# Altium PCB VESC_BMS.PcbDoc (part 3 of 4)
Units mm, origin at the board's own origin, x right, y up, seen from the top; angles counter-clockwise.
Board outline 100 x 75 mm, 4 copper layers (L1, L2, L3, L4), stack 1.446 mm thick; 263 components, 195 nets, 808 pads, 1031 vias.
Unrouted connection lines stored in the file: 1.
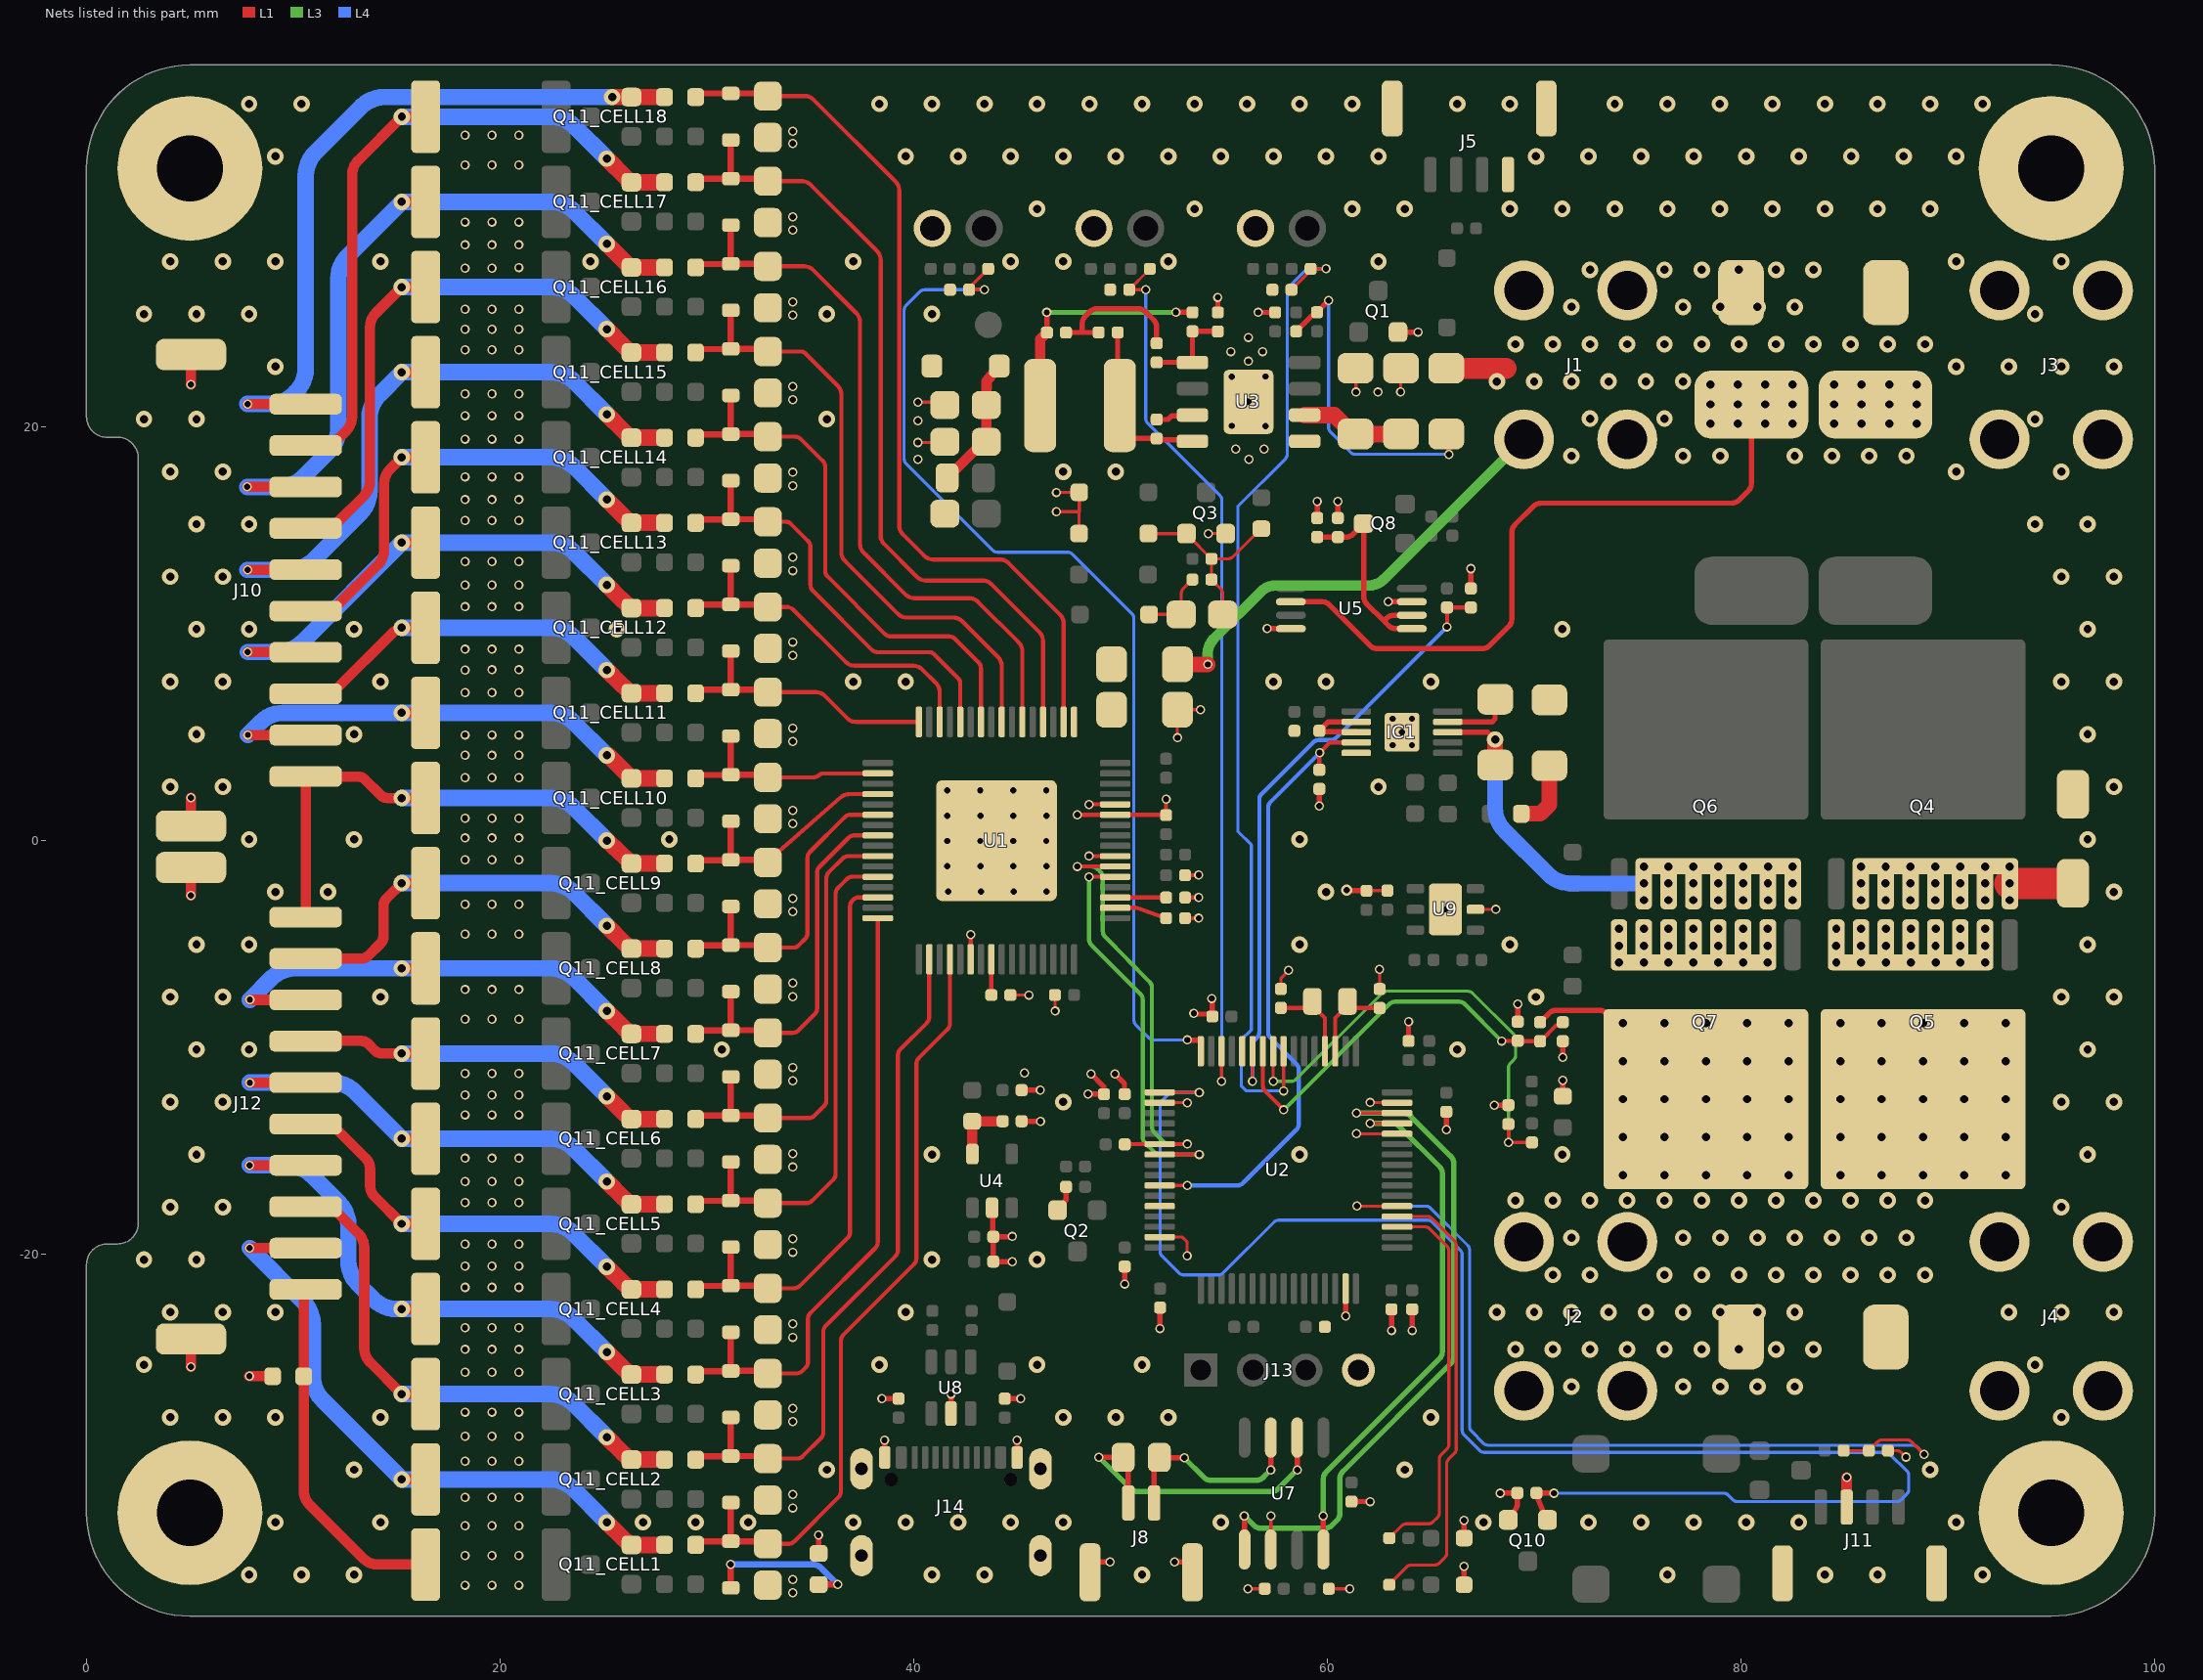
[diagram p4: the nets of this part, all layers, seen from the top]

## Via types
v1: diameter 0.8, hole 0.4, L1 to L4, tented both sides, 496 vias
v2: diameter 0.45, hole 0.3, L1 to L4, tented both sides, 449 vias
v3: diameter 0.6, hole 0.4, L1 to L4, tented both sides, 84 vias
v4: diameter 0.55, hole 0.3, L1 to L4, tented both sides, 2 vias

## Nets (pads, with @x,y where several pads share a name; then routed paths per layer and width w, separated by ;. In a path a pad name is that pad's centre, name@x,y a point inside that pad or via, vN(x,y) a via of type N, cw(c..) or ccw(c..) an arc to the next point about the centre after c; other vN are vias at no path point) (continued)
BATT+: D7.2 J1.1 R1.1 R20.1 R32.0 R33.0 U5.2 | length 57.5
  L1 w0.254: U5.2@58.232,11.548 59.733,11.548 cw(c59.733,11.04) 60.092,11.4 62.062,9.429 ccw(c62.421,9.789) 62.421,9.281 67.48,9.281 ccw(c67.48,9.789) 67.839,9.429 68.771,10.361 ccw(c68.411,10.72) 68.919,10.72 68.919,14.909 cw(c69.427,14.909) 69.067,15.267 69.968,16.169 cw(c70.327,15.809) 70.327,16.317 79.552,16.317 ccw(c79.552,16.825) 79.91,16.465 80.352,16.907 ccw(c79.992,17.265) 80.5,17.265 R33.0@80.5,21.079
  L1 w0.762: R1.1@52.748,8.523 52.754,8.518 v2(54.213,8.518)
  L1 w1.016: R20.1@65.755,22.84 68.633,22.84
  L3 w0.508: v2(54.213,8.518) 54.213,9.041 cw(c55.229,9.041) 54.509,9.759 56.792,12.041 cw(c57.509,11.322) 57.509,12.338 62.014,12.338 ccw(c62.014,13.354) 62.731,12.634 J1.1@69.497,19.4
  other v1: 71.8,18.6 77.2,18.6 79,18.6 82.6,18.6 84.4,18.6 86.2,18.6 88,18.6 78.512,20.159 79.841,20.159 81.17,20.159 82.5,20.159 84.508,20.159 85.837,20.159 87.166,20.159 88.496,20.159 72.7,20.4 76.3,20.4 78.512,21.092 79.841,21.092 81.17,21.092 82.5,21.092 84.508,21.092 85.837,21.092 87.166,21.092 88.496,21.092 78.512,22.058 79.841,22.058 81.17,22.058 82.5,22.058 84.508,22.058 85.837,22.058 87.166,22.058 88.496,22.058 68.2,22.2 70,22.2 71.8,22.2 73.6,22.2 75.4,22.2 77.2,22.2 69.1,24 70.9,24 72.7,24 74.5,24 76.3,24 78.1,24 79.9,24 81.7,24 83.5,24 85.3,24 87.1,24 88.9,24 71.8,25.8 77.2,25.8 79,25.8 80.8,25.8 82.6,25.8 72.7,27.6 76.3,27.6 78.1,27.6 79.9,27.6 81.7,27.6 83.5,27.6
BT_EN: R47.1 R48.2 U2.53 | length 43.8
  L1 w0.152: v2(61.423,-17.673) U2.53@63.369,-17.673 ; R47.1@84.965,-29.496 85.105,-29.496 R48.2@86.183,-29.496 86.613,-29.065 cw(c86.828,-29.282) 86.828,-28.977 88.019,-28.977 cw(c88.019,-29.282) 88.234,-29.066 v2(88.85,-29.681)
  L4 w0.152: v2(61.423,-17.673) 64.763,-17.673 cw(c64.763,-17.978) 64.977,-17.762 66.784,-19.568 cw(c66.568,-19.783) 66.873,-19.783 66.873,-28.333 ccw(c67.177,-28.333) 66.961,-28.548 67.558,-29.145 ccw(c67.772,-28.928) 67.772,-29.233 88.299,-29.233 cw(c88.299,-29.538) 88.514,-29.322 88.791,-29.598 cw(c88.576,-29.815) v2(88.85,-29.681)
BUZZER: Q10.G R52.1 U2.17 | length 79.7
  L1 w0.152: U2.17@51.893,-12.173 v2(53.806,-12.173)
  L1 w0.254: R52.1@70.108,-31.542 70.939,-31.542 v2(70.951,-31.554) ; R52.1@70.108,-31.542 70.136,-31.681 ccw(c70.524,-31.583) 70.151,-31.728 70.49,-32.592 Q10.G@70.648,-32.842
  L4 w0.152: v2(53.806,-12.173) 52.573,-12.173 ccw(c52.573,-12.573) 52.291,-12.29 52.027,-12.554 ccw(c52.31,-12.836) 51.91,-12.836 51.91,-19.866 ccw(c52.215,-19.866) 51.998,-20.081 52.829,-20.912 ccw(c53.044,-20.695) 53.044,-21 54.736,-21 ccw(c54.736,-20.695) 54.951,-20.912 57.422,-18.441 cw(c57.637,-18.657) 57.637,-18.353 64.859,-18.353 cw(c64.859,-18.657) 65.074,-18.441 66.428,-19.795 cw(c66.212,-20.01) 66.516,-20.01 66.516,-28.519 ccw(c66.821,-28.519) 66.605,-28.733 67.361,-29.49 ccw(c67.576,-29.273) 67.576,-29.578 86.991,-29.578 cw(c86.991,-29.883) 87.206,-29.667 88.022,-30.482 cw(c87.806,-30.697) 88.111,-30.697 88.111,-31.368 cw(c87.806,-31.368) 88.022,-31.583 87.736,-31.869 cw(c87.521,-31.653) 87.521,-31.958 79.822,-31.958 cw(c79.822,-31.653) 79.607,-31.869 79.381,-31.643 ccw(c79.166,-31.859) 79.166,-31.554 v2(70.951,-31.554)
C1: C45_CELL1.2 D13_CELL1.2 D13_CELL2.1 R58_CELL1.2 U1.36 | length 37.9
  L1 w0.2: C45_CELL1.2@32.95,-33.999 33.983,-33.999 34.021,-33.992 ccw(c33.943,-33.599) 34.226,-33.883 36.363,-31.745 ccw(c36.08,-31.463) 36.48,-31.463 36.48,-24.178 cw(c36.88,-24.178) 36.596,-23.896 40.008,-20.483 ccw(c39.725,-20.201) 40.125,-20.201 40.125,-10.801 cw(c40.525,-10.801) 40.242,-10.519 41.633,-9.127 ccw(c41.35,-8.845) 41.75,-8.845 U1.36@41.75,-5.738
  L1 w0.3: R58_CELL1.2@29.452,-34.05 29.653,-33.885 30.887,-33.885 D13_CELL1.2@31.15,-33.875 ; D13_CELL2.1@31.15,-32.007 D13_CELL1.2@31.15,-33.875 ; C45_CELL1.2@32.95,-33.999 32.613,-33.875 D13_CELL1.2@31.15,-33.875
C2: C45_CELL2.2 D13_CELL2.2 D13_CELL3.1 R58_CELL2.2 U1.34 | length 33.6
  L1 w0.2: C45_CELL2.2@32.95,-29.882 34.355,-29.882 ccw(c34.355,-29.482) 34.637,-29.765 35.51,-28.892 ccw(c35.227,-28.61) 35.627,-28.61 35.627,-23.74 cw(c36.027,-23.74) 35.743,-23.457 39.118,-20.082 ccw(c38.835,-19.8) 39.235,-19.8 39.235,-10.37 cw(c39.635,-10.37) 39.352,-10.088 40.633,-8.806 ccw(c40.35,-8.524) 40.75,-8.524 U1.34@40.75,-5.738
  L1 w0.3: R58_CELL2.2@29.452,-29.932 29.653,-29.768 30.887,-29.768 D13_CELL2.2@31.15,-29.757 ; D13_CELL3.1@31.15,-27.89 D13_CELL2.2@31.15,-29.757 ; C45_CELL2.2@32.95,-29.882 32.613,-29.757 D13_CELL2.2@31.15,-29.757
C3: C45_CELL3.2 D13_CELL3.2 D13_CELL4.1 R58_CELL3.2 U1.32 | length 30.5
  L1 w0.2: C45_CELL3.2@32.95,-25.764 34.323,-25.764 ccw(c34.323,-25.364) 34.605,-25.647 34.771,-25.482 ccw(c34.487,-25.2) 34.887,-25.2 34.887,-23.12 cw(c35.287,-23.12) 35.004,-22.838 38.145,-19.696 ccw(c37.862,-19.414) 38.262,-19.414 U1.32@38.262,-3.75
  L1 w0.3: R58_CELL3.2@29.452,-25.815 29.653,-25.65 30.887,-25.65 D13_CELL3.2@31.15,-25.64 ; D13_CELL4.1@31.15,-23.772 D13_CELL3.2@31.15,-25.64 ; C45_CELL3.2@32.95,-25.764 32.613,-25.64 D13_CELL3.2@31.15,-25.64
C4: C45_CELL4.2 D13_CELL4.2 D13_CELL5.1 R58_CELL4.2 U1.30 | length 27.9
  L1 w0.2: C45_CELL4.2@32.95,-21.646 34.203,-21.646 ccw(c34.203,-21.246) 34.485,-21.53 36.8,-19.215 ccw(c36.516,-18.933) 36.916,-18.933 36.916,-3.186 cw(c37.316,-3.186) 37.033,-2.904 37.098,-2.838 cw(c37.313,-3.055) 37.313,-2.75 U1.30@38.262,-2.75
  L1 w0.3: R58_CELL4.2@29.452,-21.697 29.653,-21.532 30.887,-21.532 D13_CELL4.2@31.15,-21.522 ; D13_CELL5.1@31.15,-19.654 D13_CELL4.2@31.15,-21.522 ; C45_CELL4.2@32.95,-21.646 32.613,-21.522 D13_CELL4.2@31.15,-21.522
C5: C45_CELL5.2 D13_CELL5.2 D13_CELL6.1 R58_CELL5.2 U1.28 | length 25.4
  L1 w0.2: C45_CELL5.2@32.95,-17.529 34.806,-17.529 ccw(c34.806,-17.129) 35.088,-17.412 36.107,-16.393 ccw(c35.824,-16.11) 36.224,-16.11 36.224,-2.562 cw(c36.624,-2.562) 36.341,-2.28 36.754,-1.867 cw(c37.036,-2.15) 37.036,-1.75 U1.28@38.262,-1.75
  L1 w0.3: R58_CELL5.2@29.452,-17.579 29.653,-17.415 30.887,-17.415 D13_CELL5.2@31.15,-17.404 ; D13_CELL6.1@31.15,-15.537 D13_CELL5.2@31.15,-17.404 ; C45_CELL5.2@32.95,-17.529 32.613,-17.404 D13_CELL5.2@31.15,-17.404
C6: C45_CELL6.2 D13_CELL6.2 D13_CELL7.1 R58_CELL6.2 U1.26 | length 22.4
  L1 w0.2: C45_CELL6.2@32.95,-13.411 34.923,-13.411 ccw(c34.923,-13.011) 35.206,-13.294 35.657,-12.843 ccw(c35.374,-12.56) 35.774,-12.56 35.774,-1.818 cw(c36.174,-1.818) 35.891,-1.535 36.559,-0.867 cw(c36.842,-1.15) 36.842,-0.75 U1.26@38.262,-0.75
  L1 w0.3: R58_CELL6.2@29.452,-13.462 29.653,-13.297 30.887,-13.297 D13_CELL6.2@31.15,-13.287 ; D13_CELL7.1@31.15,-11.419 D13_CELL6.2@31.15,-13.287 ; C45_CELL6.2@32.95,-13.411 32.613,-13.287 D13_CELL6.2@31.15,-13.287
C7: C45_CELL7.2 D13_CELL7.2 D13_CELL8.1 R58_CELL7.2 U1.24 | length 18.7
  L1 w0.2: C45_CELL7.2@32.95,-9.293 34.141,-9.293 ccw(c34.141,-8.893) 34.423,-9.177 35.213,-8.387 ccw(c34.93,-8.105) 35.33,-8.105 35.33,-1.545 cw(c35.73,-1.545) 35.446,-1.262 36.842,0.133 cw(c37.124,-0.15) 37.047,0.242 37.085,0.25 U1.24@38.262,0.25
  L1 w0.3: R58_CELL7.2@29.452,-9.344 29.653,-9.179 30.887,-9.179 D13_CELL7.2@31.15,-9.169 ; D13_CELL8.1@31.15,-7.301 D13_CELL7.2@31.15,-9.169 ; C45_CELL7.2@32.95,-9.293 32.613,-9.169 D13_CELL7.2@31.15,-9.169
C8: C45_CELL8.2 D13_CELL8.2 D13_CELL9.1 R58_CELL8.2 U1.22 | length 15.7
  L1 w0.2: C45_CELL8.2@32.95,-5.176 34.159,-5.176 ccw(c34.159,-4.776) 34.441,-5.059 34.743,-4.757 ccw(c34.459,-4.475) 34.859,-4.475 34.859,-0.835 cw(c35.259,-0.835) 34.976,-0.552 36.662,1.133 cw(c36.944,0.85) 36.944,1.25 U1.22@38.262,1.25
  L1 w0.3: R58_CELL8.2@29.452,-5.226 29.653,-5.062 30.887,-5.062 D13_CELL8.2@31.15,-5.051 ; D13_CELL9.1@31.15,-3.184 D13_CELL8.2@31.15,-5.051 ; C45_CELL8.2@32.95,-5.176 32.613,-5.051 D13_CELL8.2@31.15,-5.051
C9: C45_CELL9.2 D13_CELL9.2 D13_CELL10.1 R58_CELL9.2 U1.20 | length 12
  L1 w0.2: C45_CELL9.2@33.287,-0.69 36.461,2.086 cw(c36.899,1.584) 36.899,2.25 U1.20@38.262,2.25
  L1 w0.3: R58_CELL9.2@29.452,-1.109 29.653,-0.944 30.887,-0.944 D13_CELL9.2@31.15,-0.934 ; D13_CELL10.1@31.15,0.934 D13_CELL9.2@31.15,-0.934 ; C45_CELL9.2@33.287,-0.69 C45_CELL9.2@32.95,-1.058 32.613,-0.934 D13_CELL9.2@31.15,-0.934
C10: C45_CELL10.2 D13_CELL10.2 D13_CELL11.1 R58_CELL10.2 U1.18 | length 10.8
  L1 w0.2: C45_CELL10.2@32.95,3.06 35.146,3.06 ccw(c35.144,3.46) 35.384,3.139 35.426,3.17 cw(c35.665,2.85) 35.665,3.25 U1.18@38.262,3.25
  L1 w0.3: R58_CELL10.2@29.452,3.009 29.653,3.174 30.887,3.174 D13_CELL10.2@31.15,3.184 ; D13_CELL11.1@31.15,5.051 D13_CELL10.2@31.15,3.184 ; C45_CELL10.2@32.95,3.06 32.613,3.184 D13_CELL10.2@31.15,3.184
C11: C45_CELL11.2 D13_CELL11.2 D13_CELL12.1 R58_CELL11.2 U1.16 | length 13.3
  L1 w0.2: C45_CELL11.2@33.287,7.177 35.274,7.177 cw(c35.274,6.577) 35.698,7.002 36.787,5.913 ccw(c37.211,6.338) 37.211,5.738 U1.16@40.25,5.738
  L1 w0.3: R58_CELL11.2@29.452,7.126 29.653,7.291 30.887,7.291 D13_CELL11.2@31.15,7.301 ; D13_CELL12.1@31.15,9.169 D13_CELL11.2@31.15,7.301 ; C45_CELL11.2@33.287,7.177 C45_CELL11.2@32.95,7.177 32.613,7.301 D13_CELL11.2@31.15,7.301
C12: C45_CELL12.2 D13_CELL12.2 D13_CELL13.1 R58_CELL12.2 U1.14 | length 16.9
  L1 w0.2: C45_CELL12.2@33.287,11.295 33.93,11.295 34.127,11.214 36.721,8.63 ccw(c37.144,9.056) 37.142,8.456 39.983,8.456 cw(c39.983,7.856) 40.407,8.281 41.075,7.613 cw(c40.65,7.19) 41.237,7.313 41.25,7.252 41.25,6.916 41.25,6.326 U1.14@41.25,5.738
  L1 w0.3: R58_CELL12.2@29.452,11.244 29.653,11.409 30.887,11.409 D13_CELL12.2@31.15,11.419 ; D13_CELL13.1@31.15,13.287 D13_CELL12.2@31.15,11.419 ; C45_CELL12.2@33.287,11.295 C45_CELL12.2@32.95,11.295 32.613,11.419 D13_CELL12.2@31.15,11.419
C13: C45_CELL13.2 D13_CELL13.2 D13_CELL14.1 R58_CELL13.2 U1.12 | length 21.1
  L1 w0.2: C45_CELL13.2@32.95,15.413 33.83,15.413 cw(c33.83,15.108) 34.046,15.323 34.888,14.481 cw(c34.605,14.199) 35.005,14.199 35.005,12.36 ccw(c35.405,12.361) 35.121,12.079 37.972,9.228 ccw(c38.254,9.512) 38.253,9.112 40.723,9.112 cw(c40.723,8.712) 41.006,8.994 42.133,7.867 cw(c41.85,7.584) 42.25,7.584 42.25,6.376 U1.12@42.25,5.738
  L1 w0.3: R58_CELL13.2@29.452,15.362 29.653,15.527 30.887,15.527 D13_CELL13.2@31.15,15.537 ; D13_CELL14.1@31.15,17.404 D13_CELL13.2@31.15,15.537 ; C45_CELL13.2@32.95,15.413 32.613,15.537 D13_CELL13.2@31.15,15.537
C14: C45_CELL14.2 D13_CELL14.2 D13_CELL15.1 R58_CELL14.2 U1.10 | length 26.1
  L1 w0.2: C45_CELL14.2@32.95,19.53 34.263,19.53 cw(c34.263,19.13) 34.545,19.414 35.601,18.358 cw(c35.318,18.075) 35.718,18.075 35.718,13.046 ccw(c36.118,13.048) 35.835,12.765 38.613,9.987 ccw(c38.895,10.271) 38.893,9.871 41.713,9.871 cw(c41.713,9.471) 41.997,9.753 43.133,8.617 cw(c42.85,8.334) 43.25,8.336 43.25,6.376 U1.10@43.25,5.738
  L1 w0.3: R58_CELL14.2@29.452,19.479 29.653,19.644 30.887,19.644 D13_CELL14.2@31.15,19.654 ; D13_CELL15.1@31.15,21.522 D13_CELL14.2@31.15,19.654 ; C45_CELL14.2@32.95,19.53 32.613,19.654 D13_CELL14.2@31.15,19.654
C15: C45_CELL15.2 D13_CELL15.2 D13_CELL16.1 R58_CELL15.2 U1.8 | length 30.8
  L1 w0.2: C45_CELL15.2@33.287,23.648 C45_CELL15.2@32.95,23.648 34.539,23.648 cw(c34.539,23.348) 34.75,23.561 36.324,21.986 cw(c35.9,21.562) 36.326,21.985 cw(c35.9,21.562) 36.5,21.562 36.5,13.947 ccw(c37.1,13.949) 36.674,13.526 39.244,10.956 ccw(c39.667,11.382) 39.667,10.782 41.92,10.782 cw(c41.92,10.182) 42.344,10.606 44.075,8.875 cw(c43.65,8.451) 44.25,8.451 44.25,7.252 44.25,6.916 44.25,6.326 U1.8@44.25,5.738
  L1 w0.3: R58_CELL15.2@29.452,23.597 29.653,23.762 30.887,23.762 D13_CELL15.2@31.15,23.772 ; D13_CELL16.1@31.15,25.64 D13_CELL15.2@31.15,23.772 ; C45_CELL15.2@32.95,23.648 32.613,23.772 D13_CELL15.2@31.15,23.772
C16: C45_CELL16.2 D13_CELL16.2 D13_CELL17.1 R58_CELL16.2 U1.6 | length 35.4
  L1 w0.2: C45_CELL16.2@33.287,27.765 34.71,27.765 cw(c34.71,27.165) 35.134,27.59 37.224,25.5 cw(c36.8,25.076) 37.4,25.076 37.4,14.347 ccw(c38,14.349) 37.574,13.926 39.605,11.895 ccw(c40.027,12.321) 40.027,11.721 42.68,11.721 cw(c42.68,11.121) 43.104,11.546 45.075,9.575 cw(c44.65,9.151) 45.25,9.151 45.25,7.252 45.25,6.916 45.25,6.326 U1.6@45.25,5.738
  L1 w0.3: R58_CELL16.2@29.452,27.715 29.653,27.879 30.887,27.879 D13_CELL16.2@31.15,27.89 ; D13_CELL17.1@31.15,29.757 D13_CELL16.2@31.15,27.89 ; C45_CELL16.2@33.287,27.765 C45_CELL16.2@32.95,27.765 32.613,27.89 D13_CELL16.2@31.15,27.89
C17: C45_CELL17.2 D13_CELL17.2 D13_CELL18.1 R58_CELL17.2 U1.4 | length 40
  L1 w0.2: C45_CELL17.2@33.287,31.883 34.601,31.883 34.607,31.883 cw(c34.595,31.283) 35.019,31.708 38.224,28.503 cw(c37.8,28.079) 38.4,28.079 38.4,14.747 ccw(c39,14.749) 38.574,14.326 40.152,12.748 ccw(c40.575,13.174) 40.575,12.574 43.328,12.574 cw(c43.328,11.974) 43.752,12.398 46.075,10.075 cw(c45.65,9.651) 46.25,9.651 46.25,7.252 46.25,6.916 46.25,6.326 U1.4@46.25,5.738
  L1 w0.3: R58_CELL17.2@29.452,31.832 29.653,32.007 D13_CELL17.2@31.15,32.007 ; D13_CELL18.1@31.15,33.875 D13_CELL17.2@31.15,32.007 ; C45_CELL17.2@33.287,31.883 C45_CELL17.2@32.95,31.883 32.613,32.007 D13_CELL17.2@31.15,32.007
C18: C45_CELL18.2 D13_CELL18.2 R58_CELL18.2 U1.2 | length 43
  L1 w0.2: C45_CELL18.2@33.287,36.001 34.733,36.001 cw(c34.733,35.401) 35.156,35.826 39.125,31.857 cw(c38.7,31.434) 39.3,31.434 39.3,15.226 ccw(c39.9,15.227) 39.474,14.804 40.513,13.766 ccw(c40.936,14.192) 40.936,13.592 44.16,13.592 cw(c44.16,12.992) 44.584,13.416 47.074,10.926 cw(c46.65,10.501) 47.25,10.501 47.25,7.252 47.25,6.916 47.25,6.326 U1.2@47.25,5.738
  L1 w0.3: R58_CELL18.2@29.452,35.95 29.653,36.125 32.613,36.125 C45_CELL18.2@32.95,36.001 C45_CELL18.2@33.287,36.001
CAN_RX: U2.61 U7.4 | length 26.4
  L1 w0.152: v2(62.067,-13.673) U2.61@63.369,-13.673
  L1 w0.254: v2(59.8,-32.656) 59.802,-32.671 cw(c59.296,-32.721) 59.804,-32.721 59.804,-34.213 ccw(c60.312,-34.212) U7.4@59.808,-34.275
  L3 w0.254: v2(59.8,-32.656) ccw(c59.298,-32.577) 59.806,-32.577 59.806,-30.866 cw(c60.314,-30.866) 59.954,-30.508 65.415,-25.047 ccw(c65.055,-24.689) 65.563,-24.689 65.563,-16.11 ccw(c65.055,-16.11) 65.415,-15.751 63.484,-13.821 ccw(c63.126,-14.181) 63.126,-13.673 v2(62.067,-13.673)
CAN_TX: U2.62 U7.1 | length 33.8
  L1 w0.152: v2(61.404,-13.168) ccw(c61.449,-12.77) 61.449,-13.17 62.732,-13.17 U2.62@63.369,-13.173
  L1 w0.254: v2(55.981,-32.648) 55.984,-32.665 cw(c55.482,-32.741) 55.99,-32.741 55.99,-34.184 ccw(c56.498,-34.183) U7.1@55.998,-34.275
  L3 w0.254: v2(55.981,-32.648) 56.428,-33.095 ccw(c56.787,-32.735) 56.787,-33.243 59.88,-33.243 ccw(c59.88,-32.735) 60.238,-33.095 60.453,-32.88 ccw(c60.093,-32.521) 60.601,-32.521 60.601,-30.86 cw(c61.109,-30.86) 60.749,-30.502 65.967,-25.284 ccw(c65.607,-24.926) 66.115,-24.926 66.115,-15.62 ccw(c65.607,-15.62) 65.967,-15.261 64.024,-13.318 ccw(c63.663,-13.676) 63.663,-13.168 61.407,-13.168 cw(c61.409,-12.66) v2(61.404,-13.168)
CANH: J8.1 R53.2 U7.7 | length 9.9
  L1 w0.254: J8.1@51.625,-32.025 51.625,-30.073 R53.2@51.875,-29.823 51.892,-29.84 v2(53.08,-29.84) ; v2(57.26,-30.432) ccw(c56.756,-30.368) 57.264,-30.368 57.264,-28.927 cw(c57.772,-28.928) U7.7@57.268,-28.865
  L3 w0.254: v2(53.08,-29.84) 54.024,-30.784 ccw(c54.382,-30.424) 54.382,-30.932 56.549,-30.932 ccw(c56.549,-30.424) 56.908,-30.784 v2(57.26,-30.432)
CANL: J8.2 R53.1 U7.6 | length 15.7
  L1 w0.254: v2(48.954,-29.817) 50.119,-29.817 50.375,-30.073 J8.2@50.375,-32.025 ; v2(58.538,-30.428) U7.6@58.538,-28.865
  L3 w0.254: v2(48.954,-29.817) 50.464,-31.327 ccw(c50.822,-30.967) 50.822,-31.475 57.28,-31.475 ccw(c57.28,-30.967) 57.639,-31.327 v2(58.538,-30.428)
CHARGEENABLE: IC1.4 R44.1 U2.26 | length 30.4
  L1 w0.152: U2.26@51.893,-16.673 51.894,-16.672 53.223,-16.672 v2(53.224,-16.671)
  L1 w0.2: R44.1@59.611,3.417 v2@59.611,4.23 ; v2@59.617,4.236 60.124,4.743 IC1.4@61.399,4.743
  L4 w0.2: v2(53.224,-16.671) ccw(c53.266,-16.273) 53.266,-16.673 55.641,-16.673 ccw(c55.641,-16.273) 55.924,-16.556 58.5,-13.98 ccw(c58.217,-13.698) 58.617,-13.698 58.617,-11.077 ccw(c58.217,-11.077) 58.5,-10.794 57.252,-9.547 cw(c57.536,-9.265) 57.136,-9.265 57.136,1.59 cw(c57.536,1.59) 57.253,1.872 v2(59.624,4.243)
CM1: D13_CELL1.1 R7.2 | length 7.6
  L1 w0.3: D13_CELL1.1@31.15,-36.125 v2(31.15,-35) ; R7.2@35.4,-35.97 35.631,-35.967 36.27,-35.967 ccw(c36.269,-35.367) v2(36.325,-35.965)
  L4 w0.3: v2(31.15,-35) 35.112,-35 cw(c35.112,-35.6) 35.535,-35.175 v2(36.325,-35.965)
CN1: J12.10 R3.2 R60_CELL1.1 | length 17.3
  L1 w0.5: J12.10@10.6,-21.7 10.502,-21.95 10.502,-31.416 ccw(c11.502,-31.416) 10.793,-32.122 13.38,-34.708 ccw(c14.086,-34) 14.086,-35 R60_CELL1.1@16.4,-35
CN2: J12.9 Q11_CELL1.S R58_CELL1.1 R60_CELL2.1 | length 31.9
  L1 w0.5: v2(7.892,-19.7) J12.9@10.6,-19.7 ; v1(15.247,-30.882) R60_CELL2.1@16.4,-30.882
  L1 w0.8: v1(25.164,-32.97) 25.907,-33.713 ccw(c27.035,-32.579) 26.117,-33.889 26.275,-34 Q11_CELL1.S@26.35,-34.05 ; Q11_CELL1.S@26.272,-34.05 R58_CELL1.1@27.948,-34.05
  L4 w0.8: v2(7.892,-19.7) 10.471,-22.279 cw(c9.34,-23.41) 10.94,-23.41 10.94,-25.912 ccw(c12.54,-25.912) 11.407,-27.042 v1(15.247,-30.882) 22.413,-30.882 cw(c22.413,-32.482) 23.543,-31.349 v1(25.164,-32.97)
CN3: J12.8 Q11_CELL2.S R58_CELL2.1 R60_CELL3.1 | length 26.6
  L1 w0.5: J12.8@10.6,-17.7 12.1,-17.95 13.137,-18.987 cw(c12.43,-19.694) 13.43,-19.694 13.43,-24.533 ccw(c14.43,-24.533) 13.721,-25.239 v1(15.247,-26.764) 15.95,-26.764 R60_CELL3.1@16.4,-26.765
  L1 w0.8: v1(25.164,-28.849) 25.912,-29.597 ccw(c27.043,-28.465) 26.117,-29.77 26.275,-29.882 Q11_CELL2.S@26.35,-29.932 26.425,-29.932 27.749,-29.932 27.946,-29.932 R58_CELL2.1@27.948,-29.932
  L4 w0.8: v1(15.247,-26.764) 22.416,-26.764 cw(c22.416,-28.364) 23.548,-27.233 v1(25.164,-28.849)
CN4: J12.7 Q11_CELL3.S R58_CELL3.1 R60_CELL4.1 | length 29.5
  L1 w0.5: v2@7.893,-15.7 J12.7@10.6,-15.7 ; v1(15.247,-22.647) R60_CELL4.1@16.4,-22.647
  L1 w0.8: v1(25.164,-24.728) 25.922,-25.486 ccw(c27.05,-24.352) 26.116,-25.651 26.275,-25.765 Q11_CELL3.S@26.35,-25.815 26.425,-25.815 27.747,-25.815 27.946,-25.815 R58_CELL3.1@27.948,-25.815
  L4 w0.8: v2(7.892,-15.699) 9.738,-15.699 cw(c9.738,-17.299) 10.87,-16.169 12.194,-17.492 cw(c11.062,-18.623) 12.662,-18.623 12.662,-20.309 ccw(c14.262,-20.309) 13.129,-21.44 13.87,-22.181 ccw(c14.999,-21.047) 14.999,-22.647 v1(15.247,-22.647) 22.42,-22.647 cw(c22.42,-24.247) 23.551,-23.115 v1(25.164,-24.728)
CN5: J12.6 Q11_CELL4.S R58_CELL4.1 R60_CELL5.1 | length 22.4
  L1 w0.5: J12.6@10.6,-13.7 12.1,-13.95 13.492,-15.342 cw(c12.962,-15.872) 13.712,-15.872 13.712,-16.683 ccw(c14.462,-16.683) 13.93,-17.212 v1(15.247,-18.529) 15.95,-18.529 R60_CELL5.1@16.4,-18.529
  L1 w0.8: v1(25.164,-20.606) 25.93,-21.372 ccw(c27.058,-20.238) 26.116,-21.532 26.275,-21.647 Q11_CELL4.S@26.35,-21.697 26.425,-21.697 26.596,-21.697 27.747,-21.697 27.946,-21.697 R58_CELL4.1@27.948,-21.697
  L4 w0.8: v1(15.247,-18.529) 22.424,-18.529 cw(c22.424,-20.129) 23.555,-18.998 v1(25.164,-20.606)
CN6: J12.5 Q11_CELL5.S R58_CELL5.1 R60_CELL6.1 | length 26.2
  L1 w0.5: v2(7.897,-11.7) J12.5@10.6,-11.7 ; v1(15.247,-14.412) R60_CELL6.1@16.4,-14.412
  L1 w0.8: v1(25.164,-16.485) 25.937,-17.259 ccw(c27.066,-16.125) 26.116,-17.412 26.275,-17.529 Q11_CELL5.S@26.35,-17.579 26.425,-17.579 27.749,-17.579 27.946,-17.579 R58_CELL5.1@27.948,-17.579
  L4 w0.8: v2(7.897,-11.7) 11.873,-11.7 cw(c11.873,-13.3) 13.004,-12.169 v1(15.247,-14.412) 22.427,-14.412 cw(c22.427,-16.012) 23.559,-14.88 v1(25.164,-16.485)
CN7: J12.4 Q11_CELL6.S R58_CELL6.1 R60_CELL7.1 | length 19.9
  L1 w0.5: J12.4@10.616,-9.684 13.273,-9.684 cw(c13.273,-10.184) 13.626,-9.83 13.945,-10.149 ccw(c14.297,-9.794) 14.297,-10.294 R60_CELL7.1@16.4,-10.294
  L1 w0.8: v1(25.164,-12.364) 25.945,-13.146 ccw(c27.074,-12.011) 26.116,-13.293 26.275,-13.412 Q11_CELL6.S@26.35,-13.462 R58_CELL6.1@27.948,-13.462
  L4 w0.8: v1(15.247,-10.294) 22.431,-10.294 cw(c22.431,-11.894) 23.562,-10.763 v1(25.164,-12.364)
CN8: J12.3 Q11_CELL7.S R58_CELL7.1 R60_CELL8.1 | length 25.7
  L1 w0.5: v2(7.897,-7.696) 7.902,-7.7 J12.3@10.6,-7.7 ; v1(15.247,-6.176) 15.91,-6.176 R60_CELL8.1@16.4,-6.176
  L1 w0.8: v1(25.164,-8.243) 25.953,-9.032 ccw(c27.082,-7.898) 26.116,-9.174 26.275,-9.294 Q11_CELL7.S@26.35,-9.344 26.425,-9.344 27.747,-9.344 27.946,-9.344 R58_CELL7.1@27.948,-9.344
  L4 w0.8: v2(7.897,-7.696) 8.949,-6.644 cw(c10.079,-7.776) 10.079,-6.176 v1(15.247,-6.176) 22.435,-6.176 cw(c22.435,-7.776) 23.566,-6.645 v1(25.164,-8.243)
CN9: J12.2 Q11_CELL8.S R58_CELL8.1 R60_CELL9.1 | length 22.3
  L1 w0.5: J12.2@10.6,-5.7 13.284,-5.7 ccw(c13.284,-5.2) 13.637,-5.554 14.212,-4.98 ccw(c13.857,-4.627) 14.357,-4.627 14.357,-3.156 cw(c14.857,-3.156) 14.503,-2.803 v1(15.247,-2.059) 15.95,-2.059 R60_CELL9.1@16.4,-2.059
  L1 w0.8: v1(25.164,-4.121) 25.962,-4.919 ccw(c27.09,-3.785) 26.116,-5.055 26.275,-5.176 Q11_CELL8.S@26.35,-5.226 26.425,-5.226 27.747,-5.226 ccw(c27.747,-3.626) 27.749,-5.226 27.946,-5.226 R58_CELL8.1@27.948,-5.226
  L4 w0.8: v1(15.247,-2.059) 22.438,-2.059 cw(c22.438,-3.659) 23.569,-2.527 v1(25.164,-4.121)
CN10: J10.10 J12.1 Q11_CELL9.S R58_CELL9.1 R60_CELL10.1 | length 26.8
  L1 w0.5: J12.1@10.6,-3.696 J10.10@10.6,3.1 12.1,3.1 13.114,3.1 cw(c13.114,2.6) 13.467,2.954 14.216,2.205 ccw(c14.569,2.559) 14.569,2.059 15.95,2.059 R60_CELL10.1@16.4,2.059
  L1 w0.8: v1@25.175,0 26.297,-1.059 Q11_CELL9.S@26.35,-1.109 R58_CELL9.1@27.898,-1.109
  L4 w0.8: v1(15.247,2.059) 22.442,2.059 cw(c22.442,0.459) 23.573,1.59 v1(25.164,0)
CN11: J10.9 Q11_CELL10.S R58_CELL10.1 R60_CELL11.1 | length 25.6
  L1 w0.5: v2(7.8,5.11) 7.805,5.105 10.595,5.105 J10.9@10.6,5.1 ; v1(15.247,6.177) R60_CELL11.1@16.4,6.176
  L1 w0.8: v1@25.238,4.121 26.171,3.188 cw(c25.038,2.058) 26.286,3.059 Q11_CELL10.S@26.35,3.009 ; Q11_CELL10.S@26.325,3.009 R58_CELL10.1@27.898,3.009
  L4 w0.8: v2(7.8,5.11) 8.399,5.709 cw(c9.53,4.577) 9.53,6.177 v1(15.247,6.177) 22.445,6.177 cw(c22.445,4.577) 23.577,5.708 v1(25.164,4.121)
CN12: J10.8 Q11_CELL11.S R58_CELL11.1 R60_CELL12.1 | length 20.9
  L1 w0.5: J10.8@10.6,7.1 12.1,7.35 14.752,10.002 cw(c15.458,9.294) 15.054,10.209 v1(15.247,10.294) 15.95,10.294 R60_CELL12.1@16.4,10.294
  L1 w0.8: v1(25.164,8.242) 25.812,7.594 ccw(c26.942,8.726) 25.875,7.534 26.275,7.176 Q11_CELL11.S@26.279,7.126 ; Q11_CELL11.S@26.306,7.126 R58_CELL11.1@27.898,7.126
  L4 w0.8: v1(15.247,10.294) 22.449,10.294 cw(c22.449,8.694) 23.58,9.826 v1(25.164,8.242)
CN13: J10.7 Q11_CELL12.S R58_CELL12.1 R60_CELL13.1 | length 27.4
  L1 w0.5: v2(7.79,9.119) 7.8,9.11 10.59,9.11 J10.7@10.6,9.1 ; v1(15.247,14.412) R60_CELL13.1@16.4,14.412
  L1 w0.8: v1(25.164,12.364) 25.816,11.711 ccw(c26.946,12.844) 25.874,11.656 26.275,11.294 Q11_CELL12.S@26.283,11.244 ; Q11_CELL12.S@26.377,11.244 R58_CELL12.1@27.948,11.244
  L4 w0.8: v2(7.79,9.119) 9.291,9.119 ccw(c9.291,10.719) 10.422,9.587 v1(15.247,14.412) 22.453,14.412 cw(c22.453,12.812) 23.584,13.943 v1(25.164,12.364)
CN14: J10.6 Q11_CELL13.S R58_CELL13.1 R60_CELL14.1 | length 25
  L1 w0.5: J10.6@10.6,11.1 12.1,11.35 14.099,13.349 ccw(c13.39,14.055) 14.39,14.055 14.39,17.259 cw(c15.39,17.259) 14.682,17.965 v1(15.247,18.529) 15.95,18.529 R60_CELL14.1@16.4,18.529
  L1 w0.8: v1(25.164,16.485) 25.969,15.679 ccw(c27.097,16.814) 26.058,15.598 26.275,15.412 Q11_CELL13.S@26.287,15.362 ; Q11_CELL13.S@26.35,15.362 26.425,15.362 R58_CELL13.1@27.747,15.362 ; R58_CELL13.1@27.748,15.362 27.946,15.362 R58_CELL13.1@27.948,15.362
  L4 w0.8: v1(15.247,18.529) 22.456,18.529 cw(c22.456,16.929) 23.588,18.061 v1(25.164,16.485)
CN15: J10.5 Q11_CELL14.S R58_CELL14.1 R60_CELL15.1 | length 31.9
  L1 w0.5: v2(7.785,13.089) 7.79,13.095 10.595,13.095 J10.5@10.6,13.1 ; v1(15.247,22.647) R60_CELL15.1@16.4,22.647
  L1 w0.8: v1(25.164,20.606) 25.976,19.793 ccw(c27.105,20.928) 26.057,19.719 26.275,19.529 Q11_CELL14.S@26.29,19.479 ; Q11_CELL14.S@26.35,19.479 26.425,19.479 27.748,19.479 27.946,19.479 R58_CELL14.1@27.948,19.479
  L4 w0.8: v2(7.785,13.089) 9.837,13.089 ccw(c9.837,14.689) 10.967,13.557 13.213,15.803 ccw(c12.08,16.933) 13.68,16.933 13.68,20.418 cw(c15.28,20.418) 14.148,21.548 v1(15.247,22.647) 22.46,22.647 cw(c22.46,21.047) 23.591,22.178 v1(25.164,20.606)
CN16: J10.4 Q11_CELL15.S R58_CELL15.1 R60_CELL16.1 | length 29.2
  L1 w0.5: J10.4@10.6,15.1 12.1,15.35 13.413,16.663 ccw(c12.705,17.369) 13.705,17.369 13.705,24.808 cw(c14.705,24.808) 13.996,25.514 v1(15.247,26.765) 15.95,26.765 R60_CELL16.1@16.4,26.765
  L1 w0.8: v1(25.164,24.727) 25.983,23.908 ccw(c27.111,25.042) 26.054,23.841 26.275,23.647 Q11_CELL15.S@26.294,23.597 ; Q11_CELL15.S@26.35,23.597 26.425,23.597 27.946,23.597 R58_CELL15.1@27.948,23.597
  L4 w0.8: v1(15.247,26.765) 22.463,26.765 cw(c22.463,25.165) 23.595,26.296 v1(25.164,24.727)
CN17: J10.3 Q11_CELL16.S R58_CELL16.1 R60_CELL17.1 | length 35.9
  L1 w0.5: v2(7.774,17.102) 7.776,17.1 J10.3@10.6,17.1 ; v1(15.247,30.882) 15.91,30.882 R60_CELL17.1@16.4,30.882
  L1 w0.8: v1(25.164,28.848) 26.088,27.924 ccw(c27.216,29.058) 26.275,27.765 Q11_CELL16.S@26.297,27.715 ; Q11_CELL16.S@26.35,27.715 R58_CELL16.1@27.948,27.715
  L4 w0.8: v2(7.774,17.102) 9.346,17.102 ccw(c9.346,18.702) 10.476,17.57 11.709,18.803 ccw(c10.577,19.933) 12.177,19.933 12.177,27.149 cw(c13.777,27.149) 12.644,28.28 v1(15.247,30.882) 22.467,30.882 cw(c22.467,29.282) 23.598,30.414 v1(25.164,28.848)
CN18: J10.2 Q11_CELL17.S R58_CELL17.1 R60_CELL18.1 | length 33.5
  L1 w0.5: J10.2@10.6,19.1 12.1,19.35 12.552,19.802 ccw(c11.844,20.508) 12.844,20.508 12.844,32.178 cw(c13.844,32.178) 13.136,32.884 v1(15.249,34.998) 15.95,34.998 R60_CELL18.1@16.4,35
  L1 w0.8: v1(25.164,32.97) 26.101,32.032 ccw(c27.23,33.166) 26.275,31.882 Q11_CELL17.S@26.301,31.832 ; Q11_CELL17.S@26.306,31.832 R58_CELL17.1@27.948,31.832
  L4 w0.8: v1(15.249,34.998) 22.473,34.998 cw(c22.473,33.398) 23.604,34.529 v1(25.164,32.97)
CP18: J10.1 Q11_CELL18.S R58_CELL18.1 | length 35.1
  L1 w0.5: v2(7.785,21.11) 10.593,21.11 J10.1@10.602,21.102
  L1 w0.8: v1(25.416,35.95) Q11_CELL18.S@26.35,35.95 26.425,35.95 27.946,35.95 R58_CELL18.1@27.948,35.95
  L4 w0.8: v2(7.785,21.11) 8.886,21.11 ccw(c8.886,22.71) 10.017,21.578 10.132,21.693 ccw(c9,22.824) 10.6,22.824 10.6,32.137 cw(c12.2,32.137) 11.068,33.268 13.282,35.482 cw(c14.413,34.35) 14.413,35.95 v1(25.416,35.95)
DISCHARGEENABLE: U2.28
GND: C1.1 C2.2 C3.2 C4.2 C5.2 C6.2 C7.2 C8.2 C9.2 C10.1 C11.1 C12.1 C13.1 C14.1 C15.1 C16.1 C17.1 C18.1 C19.1 C20.1 C23.1 C24.1 C26.1 C27.1 C28.1 C30.2 C31.2 C32.2 C33.2 C35.1 C36.1 C37.1 C38.1 C39.1 C40.2 C41.1 C42.1 C43.1 C44.1 C45_CELL1.1 C45_CELL2.1 C45_CELL3.1 C45_CELL4.1 C45_CELL5.1 C45_CELL6.1 C45_CELL7.1 C45_CELL8.1 C45_CELL9.1 C45_CELL10.1 C45_CELL11.1 C45_CELL12.1 C45_CELL13.1 C45_CELL14.1 C45_CELL15.1 C45_CELL16.1 C45_CELL17.1 C45_CELL18.1 C46.1 C47.1 D1.2 D2.1 D6.1 D7.1 D8.1 D9.2 D10.1 D11.1 IC1.2 IC1.3 IC1.5 IC1.11 J3.1 J4.1 J5.1 J5.5 J5.6 J6.1 J7.1 J8.3 J8.4 J9.1 J10.11 J10.12 J11.2 J11.5 J11.6 J12.11 J12.12 J13.4 J14.1 J14.12 J14.13 J14.14 pad.0 Q1.S Q2.S Q3.S Q10.S R2.1 R3.1 R5.1 R7.1 R16.1 R25.1 R26.1 R31.1 R40.2 R44.2 R48.1 R49.2 R52.2 R54.2 R57.2 U1.38 U1.55 U1.59 U1.60 U1.65 U2.12 U2.18 U2.31 U2.47 U2.60 U2.63 U3.1 U3.9 U4.2 U5.4 U5.7 U7.2 U8.2 U9.2 U9.7 | length 95.6
  L1 w0.152: v2(40.198,19.249) C27.1@41.497,19.249 ; v2(40.198,21.197) C26.1@41.505,21.197 ; C2.2@44.67,-7.465 44.672,-7.466 45.573,-7.466 v2(45.575,-7.468) ; C3.2@46.83,-7.464 46.833,-7.467 46.833,-8.239 v2(46.836,-8.242) ; v2(46.9,16.835) D2.1@47.998,16.835 ; v2@46.904,15.899 47.994,15.899 D6.1@47.994,14.843 ; 47.998,15.899 D2.1@47.998,16.835 ; D2.1@48.001,16.843 47.998,16.84 D2.1@47.998,16.835 ; U2.31@51.893,-19.173 U2.31@51.893,-19.173 52.986,-19.172 53.218,-19.404 v2(53.218,-20.082) ; U2.18@51.893,-12.673 52.504,-12.672 v2(53.225,-12.67) ; v2(52.748,4.971) C1.1@52.748,6.326 v2(53.869,6.326) ; v2(54.249,14.846) 55.083,14.846 Q3.S@55.086,14.843 ; v2(56.162,-36.171) C43.1@56.97,-36.172 ; U7.2@57.268,-34.275 v2(57.268,-32.648) ; R25.1@57.461,25.555 R25.1@57.474,25.542 ; C11.1@57.753,-7.17 57.756,-7.167 57.756,-6.651 58.126,-6.28 v2(58.126,-6.272) ; C42.1@60.072,-36.172 v2(61.084,-36.171) ; C23.1@61.363,22.84 61.385,22.819 v2(61.385,21.684) ; v2(61.407,-14.173) U2.60@63.369,-14.173 ; C46.1@61.878,-2.413 61.887,-2.422 62.9,-2.422 C47.1@62.904,-2.418 ; v2(62.066,-12.664) ccw(c62.135,-12.16) 62.135,-12.668 62.759,-12.668 U2.63@63.369,-12.673 ; C10.1@62.525,-7.175 v2(62.525,-6.219) ; C24.1@63.536,22.854 63.536,22.867 C24.1@63.563,22.84 63.544,22.821 v2(63.544,21.689) ; U9.2@67.156,-3.327 v2(68.139,-3.327) ; R48.1@87.103,-29.496 87.529,-29.496 cw(c87.529,-29.8) 87.735,-29.575 v2(87.985,-29.804)
  L1 w0.2: U1.38@42.75,-5.738 v2(42.75,-4.55) ; v2(47.9,1.241) cw(c47.966,0.738) 47.966,1.246 49.127,1.246 U1.59@49.738,1.25 52.061,1.25 52.174,1.185 R5.1@52.2,1.17 ; v2(48.474,-0.75) U1.55@49.738,-0.75 ; v2(48.474,1.75) U1.60@49.738,1.75 ; R5.1@52.2,1.231 52.2,1.371 v2(52.2,1.998) ; C5.2@53.12,-3.75 v2(53.78,-3.75) ; C4.2@53.12,-2.75 v2(53.78,-2.75) ; R2.1@53.12,-1.677 53.126,-1.67 53.774,-1.67 v2(53.78,-1.664)
  L1 w0.254: v2(35.393,-33.575) 35.395,-33.595 cw(c34.889,-33.636) 35.397,-33.634 35.397,-34.265 R7.1@35.4,-34.466 ; v2(38.462,-26.982) cw(c38.497,-27.489) 38.497,-26.981 39.123,-26.981 R54.2@39.263,-26.98 ; J14.1@38.6,-29.825 38.592,-29.817 38.592,-29.008 v2@38.6,-29.001 ; U8.2@41.8,-27.7 v2(41.8,-26.757) ; U4.2@43.786,-17.755 43.816,-18.106 43.816,-19.015 C33.2@43.846,-19.154 ; R57.2@44.4,-26.98 v2(45.175,-26.98) ; v2(44.756,-20.354) cw(c44.745,-19.846) 44.747,-20.354 43.985,-20.354 C32.2@43.846,-20.354 C33.2@43.846,-19.154 ; v2(44.756,-19.142) cw(c44.677,-18.64) 44.678,-19.148 43.985,-19.148 C33.2@43.846,-19.154 ; J14.12@45,-29.825 44.996,-29.821 44.996,-28.999 v2@45,-28.994 ; C30.2@45.217,-13.571 45.356,-13.573 46.074,-13.573 cw(c46.073,-14.081) 46.119,-13.575 v2(46.125,-13.576) ; C31.2@45.217,-12.067 v2(46.122,-12.067) ; Q2.S@46.959,-17.864 46.959,-17.786 47.366,-17.38 R31.1@47.366,-16.739 ; v2(48.424,-12.259) C16.1@49.2,-12.259 49.196,-12.256 49.196,-11.901 v2(48.577,-11.281) ; J8.3@48.525,-34.875 v2(49.49,-34.875) ; v2(49.732,-11.286) 50.192,-11.745 50.192,-12.251 C19.1@50.2,-12.259 ; v2(50.2,-21.437) C14.1@50.2,-20.593 ; v2(51.91,-23.59) C13.1@51.91,-22.581 ; v2(52.609,-34.875) J8.4@53.475,-34.875 ; v2(53.545,-8.35) 53.582,-8.388 54.327,-8.388 C15.1@54.44,-8.5 54.44,-7.67 v2(54.404,-7.633) ; R26.1@54.702,25.537 v2(54.702,26.267) ; v2(56.657,25.537) 56.66,25.54 57.445,25.54 R25.1@57.461,25.555 ; v2(57.09,10.247) U5.4@58.19,10.247 ; C39.1@59.506,15.596 v2(59.506,16.4) ; v2(59.608,1.675) 59.609,1.677 R44.2@59.611,2.497 R44.2@59.611,2.497 ; C38.1@60.506,15.596 60.51,15.6 60.51,16.396 v2(60.514,16.4) ; v2(60.881,-22.986) U2.47@60.881,-21.661 ; v4(60.926,-2.4) 60.939,-2.413 C46.1@61.878,-2.413 ; C44.1@61.166,-31.958 v2@62.064,-31.958 ; IC1.3@61.399,5.243 61.376,5.266 59.652,5.266 C40.2@59.611,5.307 60.047,5.743 IC1.2@61.399,5.743 ; C46.1@61.887,-2.422 C46.1@61.891,-2.427 ; v2(62.947,11.548) U5.7@64.084,11.548 ; v2(63.1,-23.685) C17.1@63.1,-22.66 ; Q1.S@63.415,24.588 v2(64.389,24.588) ; C12.1@63.927,-9.69 v2(63.927,-8.746) ; v2(64.1,-23.685) C20.1@64.1,-22.66 ; v2(65.752,-13.983) C18.1@65.752,-13.11 ; D11.1@66.611,-35.978 v2@66.611,-35.092 ; D10.1@66.611,-33.725 v2@66.611,-32.87 ; C37.1@66.94,12.192 66.942,12.194 v2(66.944,13.15) v2(66.944,13.15) ; v2(68.065,-12.79) C9.2@68.753,-12.79 ; v2(68.364,-31.554) 68.374,-31.544 69.186,-31.544 R52.2@69.192,-31.537 ; Q10.S@68.748,-32.842 68.922,-32.592 69.1,-32.329 ccw(c68.68,-32.044) 69.188,-32.044 R52.2@69.188,-31.542 ; C36.1@69.206,-8.759 v2(69.206,-7.902) ; R16.1@71.383,-12.358 v2(71.383,-11.591) ; v2(71.383,-10.471) R40.2@71.383,-9.709
  L1 w0.5: v2(5.052,-25.442) J12.11@5.052,-24.098 ; v2(5.052,-2.661) J12.12@5.052,-1.298 ; J10.11@5.052,0.702 v2(5.052,2.066) ; v2(5.052,22.045) J10.12@5.052,23.502 ; v2(7.875,-25.9) R3.1@8.998,-25.9
  L1 w0.508: J11.2@85.111,-32.225 v2(85.111,-30.792)
  other v1: 7.86,-35.5 10.4,-35.5 12.94,-35.5 40.88,-35.5 43.42,-35.5 51.04,-35.5 76.44,-35.5 84.06,-35.5 86.6,-35.5 91.68,-35.5 9.13,-32.96 14.21,-32.96 26.91,-32.96 29.45,-32.96 31.99,-32.96 37.07,-32.96 39.61,-32.96 42.15,-32.96 44.69,-32.96 47.23,-32.96 54.85,-32.96 67.55,-32.96 72.63,-32.96 75.17,-32.96 77.71,-32.96 80.25,-32.96 82.79,-32.96 90.41,-32.96 12.94,-30.42 35.8,-30.42 63.74,-30.42 89.14,-30.42 4.05,-27.88 6.59,-27.88 9.13,-27.88 14.21,-27.88 47.23,-27.88 49.77,-27.88 52.31,-27.88 65.01,-27.88 95.49,-27.88 2.78,-25.34 38.34,-25.34 45.96,-25.34 51.04,-25.34 94.22,-25.34 4.05,-22.8 6.59,-22.8 9.13,-22.8 39.61,-22.8 92.95,-22.8 95.49,-22.8 98.03,-22.8 2.78,-20.26 5.32,-20.26 40.88,-20.26 45.96,-20.26 4.05,-17.72 6.59,-17.72 95.49,-17.72 5.32,-15.18 40.88,-15.18 58.66,-15.18 71.36,-15.18 96.76,-15.18 4.05,-12.64 6.59,-12.64 47.23,-12.64 95.49,-12.64 98.03,-12.64 5.32,-10.1 7.86,-10.1 30.72,-10.1 66.28,-10.1 96.76,-10.1 4.05,-7.56 6.59,-7.56 14.21,-7.56 70.09,-7.56 95.49,-7.56 98.03,-7.56 5.32,-5.02 7.86,-5.02 58.66,-5.02 68.82,-5.02 96.76,-5.02 9.13,-2.48 11.67,-2.48 59.93,-2.48 98.03,-2.48 7.86,0.06 12.94,0.06 28.18,0.06 58.66,0.06 96.76,0.06 4.05,2.6 6.59,2.6 62.47,2.6 98.03,2.6 5.32,5.14 12.94,5.14 96.76,5.14 4.05,7.68 6.59,7.68 14.21,7.68 37.07,7.68 39.61,7.68 57.39,7.68 59.93,7.68 65.01,7.68 95.49,7.68 98.03,7.68 5.32,10.22 7.86,10.22 12.94,10.22 25.64,10.22 71.36,10.22 96.76,10.22 4.05,12.76 6.59,12.76 95.49,12.76 98.03,12.76 5.32,15.3 7.86,15.3 94.22,15.3 96.76,15.3 4.05,17.84 6.59,17.84 47.23,17.84 49.77,17.84 90.41,17.84 95.49,17.84 2.78,20.38 5.32,20.38 35.8,20.38 94.22,20.38 9.13,22.92 90.41,22.92 92.95,22.92 95.49,22.92 98.03,22.92 2.78,25.46 5.32,25.46 7.86,25.46 35.8,25.46 40.88,25.46 94.22,25.46 4.05,28 6.59,28 9.13,28 14.21,28 24.37,28 37.07,28 44.69,28 47.23,28 52.31,28 62.47,28 90.41,28 95.49,28 45.96,30.54 53.58,30.54 61.2,30.54 63.74,30.54 68.82,30.54 71.36,30.54 73.9,30.54 76.44,30.54 78.98,30.54 81.52,30.54 84.06,30.54 86.6,30.54 89.14,30.54 9.13,33.08 39.61,33.08 42.15,33.08 44.69,33.08 47.23,33.08 49.77,33.08 52.31,33.08 54.85,33.08 57.39,33.08 59.93,33.08 62.47,33.08 70.09,33.08 72.63,33.08 75.17,33.08 77.71,33.08 80.25,33.08 82.79,33.08 85.33,33.08 87.87,33.08 90.41,33.08 7.86,35.62 10.4,35.62 38.34,35.62 40.88,35.62 43.42,35.62 45.96,35.62 48.5,35.62 51.04,35.62 53.58,35.62 56.12,35.62 58.66,35.62 61.2,35.62 66.28,35.62 68.82,35.62 73.9,35.62 76.44,35.62 78.98,35.62 81.52,35.62 84.06,35.62 86.6,35.62 89.14,35.62 91.68,35.62
  other v2: 34.151,-36.365 18.3,-36.002 19.6,-36.002 20.9,-36.002 34.151,-35.719 66.612,-35.092 18.3,-34.562 19.6,-34.562 20.9,-34.562 18.3,-33.122 19.6,-33.122 20.9,-33.122 66.611,-32.87 34.151,-32.264 62.064,-31.958 18.3,-31.748 19.6,-31.748 20.9,-31.748 34.151,-31.618 18.3,-30.011 19.6,-30.011 20.9,-30.011 38.585,-28.986 44.992,-28.986 18.3,-28.802 19.6,-28.802 20.9,-28.802 34.151,-28.098 18.3,-27.631 19.6,-27.631 20.9,-27.631 34.151,-27.452 18.3,-25.702 19.6,-25.702 20.9,-25.702 18.3,-24.601 19.6,-24.601 20.9,-24.601 34.151,-24.016 18.3,-23.559 19.6,-23.559 20.9,-23.559 34.151,-23.37 18.3,-21.601 19.6,-21.601 20.9,-21.601 18.3,-20.58 19.6,-20.58 20.9,-20.58 34.151,-19.9 18.3,-19.502 19.6,-19.502 20.9,-19.502 34.151,-19.254 18.3,-17.492 19.6,-17.492 20.9,-17.492 18.3,-16.485 19.6,-16.485 20.9,-16.485 34.151,-15.783 18.3,-15.358 19.6,-15.358 20.9,-15.358 34.151,-15.137 18.3,-13.259 19.6,-13.259 20.9,-13.259 18.3,-12.292 19.6,-12.292 20.9,-12.292 34.151,-11.61 18.3,-11.267 19.6,-11.267 20.9,-11.267 45.356,-11.237 34.151,-10.964 18.3,-8.641 19.6,-8.641 20.9,-8.641 34.151,-7.539 18.3,-7.201 19.6,-7.201 20.9,-7.201 34.151,-6.893 18.3,-4.52 19.6,-4.52 20.9,-4.52 34.151,-3.44 65.706,-3.327 18.3,-3.08 19.6,-3.08 20.9,-3.08 34.151,-2.794 41.675,-2.46 43.255,-2.46 44.834,-2.46 46.414,-2.46 41.626,-1.239 43.222,-1.239 44.818,-1.239 46.414,-1.239 18.3,-0.93 19.6,-0.93 20.9,-0.93 41.622,-0.017 43.218,-0.017 44.814,-0.017 46.409,-0.017 18.3,0.127 19.6,0.127 20.9,0.127 34.151,0.821 18.3,1.086 19.6,1.086 20.9,1.086 41.626,1.204 43.222,1.204 44.818,1.204 46.414,1.204 34.151,1.467 41.622,2.425 43.218,2.425 44.814,2.425 46.409,2.425 19.6,3.043 18.3,3.049 20.9,3.049 18.3,4.127 19.6,4.121 20.9,4.127 63.15,4.615 64.088,4.615 34.151,4.795 18.3,5.11 19.6,5.11 20.9,5.11 63.611,5.243 34.151,5.441 63.149,5.893 64.088,5.895 18.3,7.159 19.6,7.159 20.9,7.159 18.3,8.242 19.6,8.256 20.9,8.256 34.151,8.954 18.3,9.25 19.6,9.25 20.9,9.25 34.151,9.6 18.3,11.309 19.6,11.309 20.9,11.309 18.3,12.364 19.6,12.364 20.9,12.364 34.151,13.054 18.3,13.488 19.6,13.488 20.9,13.488 34.151,13.7 18.3,15.476 19.6,15.476 20.9,15.476 46.9,15.903 18.3,16.485 19.6,16.485 20.9,16.485 34.151,17.164 18.3,17.591 19.6,17.591 20.9,17.591 34.151,17.809 40.198,18.432 56.205,18.432 55.573,18.932 56.932,18.932 18.3,19.411 19.6,19.411 20.9,19.411 55.374,20.05 57.007,20.043 40.198,20.299 18.3,20.547 19.6,20.547 20.9,20.547 56.179,21.22 34.151,21.317 18.3,21.6 19.6,21.6 20.9,21.6 62.439,21.684 34.151,21.963 55.378,22.434 57.007,22.443 56.179,23.174 55.328,23.643 56.869,23.645 18.3,23.722 19.6,23.722 20.9,23.722 56.175,24.328 18.3,24.727 19.6,24.727 20.9,24.727 34.151,25.4 18.3,25.685 19.6,25.685 20.9,25.686 34.151,26.046 18.3,27.671 19.6,27.671 20.9,27.71 18.3,28.8 19.6,28.8 20.9,28.8 34.151,29.52 18.3,29.909 19.6,29.909 20.9,29.909 34.151,30.166 18.3,32.659 19.6,32.659 20.9,32.659 34.151,33.7 18.3,34.099 19.6,34.099 20.9,34.099 34.151,34.3
LED_GREEN: R51.2 U2.52 | length 22
  L1 w0.152: R51.2@62.991,-35.965 63.843,-35.113 cw(c64.058,-35.33) 64.058,-35.025 65.192,-35.025 ccw(c65.192,-34.72) 65.407,-34.936 65.678,-34.665 ccw(c65.462,-34.45) 65.767,-34.45 65.767,-30.135 cw(c66.072,-30.135) 65.856,-29.92 66.14,-29.636 ccw(c65.924,-29.421) 66.229,-29.421 66.229,-19.563 ccw(c65.924,-19.563) 66.14,-19.348 65.054,-18.262 ccw(c64.839,-18.478) 64.839,-18.173 U2.52@63.369,-18.173
LED_RED: R50.2 U2.51 | length 18.8
  L1 w0.152: R50.2@62.991,-33.725 63.592,-33.124 cw(c63.807,-33.341) 63.807,-33.036 64.882,-33.036 ccw(c64.882,-32.731) 65.097,-32.947 65.323,-32.721 ccw(c65.107,-32.507) 65.412,-32.507 65.412,-29.912 cw(c65.716,-29.912) 65.5,-29.697 65.785,-29.412 ccw(c65.569,-29.197) 65.874,-29.197 65.874,-19.825 ccw(c65.569,-19.825) 65.785,-19.61 64.936,-18.762 ccw(c64.721,-18.978) 64.721,-18.673 U2.51@63.369,-18.673
LoadOut: D8.2 J2.1 Q5.D Q7.D R36.2 | length 4.4
  L1 w0.254: R36.2@70.287,-8.779 70.708,-8.357 cw(c71.067,-8.717) 71.067,-8.209 73.15,-8.209 cw(c73.15,-8.717) 73.395,-8.273 73.568,-8.367 v1(74.3,-8.814)
  other v1: 71.8,-26.4 77.2,-26.4 79,-26.4 80.8,-26.4 82.6,-26.4 69.1,-24.6 70.9,-24.6 72.7,-24.6 74.5,-24.6 76.3,-24.6 78.1,-24.6 79.9,-24.6 81.7,-24.6 83.5,-24.6 68.2,-22.8 70,-22.8 71.8,-22.8 73.6,-22.8 75.4,-22.8 77.2,-22.8 79,-22.8 80.8,-22.8 82.6,-22.8 70.9,-21 72.7,-21 76.3,-21 78.1,-21 79.9,-21 81.7,-21 83.5,-21 85.3,-21 87.1,-21 88.9,-21 71.8,-19.2 77.2,-19.2 79,-19.2 80.8,-19.2 82.6,-19.2 84.4,-19.2 86.2,-19.2 88,-19.2 69.1,-17.4 70.9,-17.4 72.7,-17.4 74.5,-17.4 76.3,-17.4 78.1,-17.4 79.9,-17.4 81.7,-17.4 83.5,-17.4 85.3,-17.4 87.1,-17.4 88.9,-17.4 74.3,-16.186 76.3,-16.186 78.3,-16.186 80.3,-16.186 82.3,-16.186 84.8,-16.186 86.8,-16.186 88.8,-16.186 90.8,-16.186 92.8,-16.186 74.3,-14.343 76.3,-14.343 78.3,-14.343 80.3,-14.343 82.3,-14.343 84.8,-14.343 86.8,-14.343 88.8,-14.343 90.8,-14.343 92.8,-14.343 74.3,-12.5 76.3,-12.5 78.3,-12.5 80.3,-12.5 82.3,-12.5 84.8,-12.5 86.8,-12.5 88.8,-12.5 90.8,-12.5 92.8,-12.5 74.3,-10.657 76.3,-10.657 78.3,-10.657 80.3,-10.657 82.3,-10.657 84.8,-10.657 86.8,-10.657 88.8,-10.657 90.8,-10.657 92.8,-10.657 76.3,-8.814 78.3,-8.814 80.3,-8.814 82.3,-8.814 84.8,-8.814 86.8,-8.814 88.8,-8.814 90.8,-8.814 92.8,-8.814
MISO: R17.1 U1.54 U2.22 | length 21.5
  L1 w0.2: v2(47.9,-1.25) U1.54@49.738,-1.25 ; R17.1@50.2,-14.686 50.206,-14.679 51.887,-14.679 U2.22@51.893,-14.673 v2(53.224,-14.673)
  L3 w0.2: v2(47.9,-1.25) 48.594,-1.25 cw(c48.594,-1.65) 48.877,-1.367 49.023,-1.513 cw(c48.74,-1.796) 49.14,-1.796 49.14,-4.367 ccw(c49.54,-4.367) 49.255,-4.648 51.403,-6.831 cw(c51.118,-7.112) 51.518,-7.112 51.518,-13.839 ccw(c51.918,-13.839) 51.634,-14.121 52.07,-14.556 ccw(c52.352,-14.273) 52.352,-14.673 v2(53.224,-14.673)
MOSI: U1.53 U2.23 | length 19.9
  L1 w0.2: v2(48.474,-1.75) U1.53@49.738,-1.75 ; U2.23@51.893,-15.173 v2(53.806,-15.173)
  L3 w0.2: v2(48.474,-1.75) 48.474,-4.762 ccw(c48.874,-4.762) 48.59,-5.043 50.954,-7.408 cw(c50.671,-7.69) 51.071,-7.69 51.071,-14.336 ccw(c51.471,-14.336) 51.188,-14.619 51.624,-15.055 ccw(c51.908,-14.773) 51.908,-15.173 v2(53.806,-15.173)
NetC1_2: C1.2 R1.2 U1.1
NetC2_1: C2.1 U1.40 | length 1.7
  L1 w0.2: U1.40@43.75,-5.738 C2.1@43.75,-7.465 C2.1@43.753,-7.468
NetC4_1: C4.1 U1.51 | length 2.5
  L1 w0.2: U1.51@49.738,-2.75 C4.1@52.2,-2.75
NetC5_1: C5.1 U1.50 | length 2.5
  L1 w0.2: U1.50@49.738,-3.25 50.349,-3.25 50.705,-3.25 cw(c50.705,-3.758) 50.873,-3.278 52.061,-3.696 C5.1@52.2,-3.75
NetC6_1: C6.1 R11.2 U2.14 | length 43.4
  L1 w0.152: C6.1@50.422,26.637 50.425,26.64 51.222,26.64 v2(51.225,26.643) ; C6.1@50.422,26.643 51.418,27.639 R11.2@51.418,27.645 ; v2(54.881,-11.637) U2.14@54.881,-10.185
  L4 w0.152: v2@51.215,26.643 51.215,20.402 ccw(c51.52,20.402) 51.304,20.187 54.803,16.687 cw(c54.587,16.473) 54.891,16.473 54.891,-11.56 cw(c54.587,-11.558) v2(54.881,-11.637)
NetC7_1: C7.1 R13.2 U2.16 | length 51.7
  L1 w0.152: v2(43.422,26.632) 43.419,26.634 42.679,26.634 C7.1@42.676,26.637 42.844,26.805 42.844,26.887 R13.2@43.602,27.645
  L1 w0.254: v2(53.227,-9.637) 53.234,-9.643 53.858,-9.643 53.881,-9.666 U2.16@53.881,-10.185
  L4 w0.152: v2(43.422,26.632) 40.518,26.632 ccw(c40.518,26.327) 40.303,26.543 39.62,25.86 ccw(c39.836,25.645) 39.531,25.645 39.531,18.452 ccw(c39.836,18.452) 39.619,18.238 43.825,14.032 ccw(c44.04,14.248) 44.04,13.943 47.449,13.943 cw(c47.449,13.638) 47.664,13.855 50.553,10.966 cw(c50.337,10.751) 50.641,10.751 50.641,-8.683 ccw(c50.946,-8.683) 50.73,-8.897 51.381,-9.548 ccw(c51.595,-9.332) 51.595,-9.637 v2(53.227,-9.637)
NetC8_1: C8.1 R15.2 U2.8 | length 48.4
  L1 w0.152: v2(57.88,-12.101) ccw(c57.481,-12.085) 57.881,-12.085 57.881,-10.822 U2.8@57.881,-10.185 ; C8.1@58.263,26.632 59.021,27.39 59.021,27.472 R15.2@59.189,27.64 ; R15.2@59.189,27.645 v2(59.93,27.645)
  L4 w0.152: v2(57.88,-12.101) 56.086,-12.101 55.835,-11.85 55.835,-9.637 56.321,-9.151 56.321,-0.204 55.673,0.444 55.673,16.168 57.97,18.466 ccw(c57.754,18.681) 58.059,18.681 58.059,26.566 cw(c58.364,26.566) 58.148,26.781 58.924,27.557 cw(c59.138,27.34) 59.138,27.645 v2(59.93,27.645)
NetC9_1: C9.1 R9.2 U2.9 | length 23.1
  L1 w0.152: v2(57.381,-11.637) U2.9@57.381,-10.185 ; C9.1@68.753,-13.71 68.757,-13.713 68.757,-14.592 v2(68.76,-14.595) ; v2@68.762,-14.593 R9.2@69.894,-14.593
  L3 w0.152: v2(57.381,-11.637) 58.267,-11.637 ccw(c58.267,-11.332) 58.482,-11.548 62.661,-7.369 cw(c62.875,-7.585) 62.875,-7.28 66.79,-7.28 cw(c66.79,-7.585) 67.005,-7.369 69.011,-9.375 cw(c68.795,-9.59) 69.1,-9.59 69.1,-10.384 cw(c68.795,-10.384) 69.011,-10.599 68.848,-10.761 ccw(c69.064,-10.976) 68.76,-10.976 v2(68.76,-14.595)
NetC10_2: C10.2 U2.3 Y1.2 | length 4.3
  L1 w0.2: U2.3@60.381,-10.185 60.381,-8.571 60.976,-7.976 Y1.2@60.976,-7.773 61.297,-8.095 C10.2@62.525,-8.095
NetC11_2: C11.2 U2.4 Y1.1 | length 4.3
  L1 w0.2: C11.2@57.753,-8.09 58.959,-8.09 Y1.1@59.276,-7.773 59.276,-7.973 59.881,-8.578 U2.4@59.881,-10.185
NetC21_1: C21.1 U3.7 | length 1.8
  L1 w0.254: C21.1@51.756,20.362 52.303,20.362 52.485,20.544 53.444,20.544 U3.7@53.476,20.576
NetC21_2: C21.2 L1.1 R21.2 U3.8 | length 8.4
  L1 w0.254: R21.2@49.86,24.572 49.86,21.139 L1.1@49.964,21.035 49.964,20.07 50.592,19.442 C21.2@51.743,19.442 51.811,19.374 53.408,19.374 U3.8@53.476,19.306
NetC22_1: C22.1 C25.1 R21.1 | length 7.2
  L1 w0.254: C22.1@47.362,24.565 47.501,24.569 48.151,24.569 ; R21.1@48.94,24.572 48.801,24.569 48.151,24.569 ; C25.1@51.743,24.043 51.743,24.182 51.743,24.823 ccw(c51.235,24.823) 51.595,25.182 51.212,25.565 ccw(c50.854,25.205) 50.854,25.713 48.864,25.713 ccw(c48.864,25.205) 48.506,25.565 48.299,25.358 ccw(c48.659,24.999) 48.151,24.999 48.151,24.569
NetC22_2: C22.2 C26.2 C27.2 D1.1 L1.2 R19.2 R24.2 | length 18.2
  L1 w0.254: v2(46.43,25.537) 46.436,25.531 46.436,24.571 C22.2@46.442,24.565 ; v2(52.674,25.542) R24.2@53.476,25.542
  L1 w0.508: R19.2@41.614,17.535 43.249,19.17 cw(c43.507,18.913) C27.2@43.507,19.277 C26.2@43.507,21.063 43.511,21.4 43.519,22.204 43.888,22.647 D1.1@44.134,22.943 ; L1.2@46.114,21.035 46.114,24.237 C22.2@46.442,24.565
  L3 w0.254: v2(46.43,25.537) 46.432,25.54 52.672,25.54 v2(52.674,25.542)
NetC23_2: C23.2 C24.2 R20.2 R22.2 R23.2 U3.2 | length 20.8
  L1 w0.254: R22.2@58.49,24.622 59.265,25.397 59.352,25.397 R23.2@59.5,25.545 59.5,25.55 60.056,26.106 v2(60.056,26.11) ; R20.2@65.864,19.656 65.87,19.65 v2(65.87,18.677)
  L1 w0.8: U3.2@58.9,20.576 60.324,20.576 61.243,19.658 C23.2@61.363,19.658 C24.2@63.563,19.658
  L4 w0.152: v2(60.056,26.11) 60.056,19.968 ccw(c60.361,19.968) 60.144,19.754 61.133,18.765 ccw(c61.347,18.982) 61.347,18.677 v2(65.87,18.677)
NetC25_2: C25.2 R24.1 R26.2 U3.5 | length 4.5
  L1 w0.254: C25.2@51.743,23.123 U3.5@53.469,23.123 ; U3.5@53.476,23.116 R24.1@53.476,24.622 53.478,24.62 54.7,24.62 R26.2@54.702,24.617
NetC29_1: C29.1 D6.2 Q3.G R27.2 R28.1 R30.2 | length 9.5
  L1 w0.152: D6.2@51.344,14.843 Q3.G@53.186,14.843 53.411,14.602 54.254,13.758 ccw(c54.468,13.975) 54.256,13.756 R27.2@54.396,13.625 ; C29.1@54.936,10.934 54.936,11.953 ccw(c54.632,11.953) 54.848,12.168 54.535,12.481 R30.2@54.396,12.62 R27.2@54.396,13.625 ; R28.1@56.806,15.077 56.576,14.876 55.414,13.714 cw(c55.199,13.93) 55.199,13.625 R27.2@54.396,13.625
NetC29_2: C29.2 D5.2 R30.1 | length 3.5
  L1 w0.152: D5.2@51.381,10.934 C29.2@52.935,10.934 52.935,11.953 cw(c53.24,11.953) 53.024,12.168 R30.1@53.476,12.62
NetC30_1: C30.1 L2.1 U4.5 | length 3.1
  L1 w0.508: U4.5@42.836,-15.154 42.83,-14.804 42.83,-13.772 L2.1@42.825,-13.571 C30.1@44.297,-13.571
NetC34_1: C34.1 IC1.9 | length 3.3
  L1 w0.254: IC1.9@65.823,5.743 65.834,5.732 67.962,5.732 68.111,5.881 C34.1@68.111,6.835
NetC34_2: C34.2 D9.1 IC1.8 Q4.S Q5.S Q6.S Q7.S | length 19
  L1 w0.254: IC1.8@65.823,5.243 67.756,5.243 v1(68.111,4.887) ; Q4.S@92.999,-2.086 Q4.S@93.003,-2.082
  L1 w0.762: C34.2@68.111,3.653 v1(68.111,4.887) ; v3(92.987,-2.066) Q4.S@92.996,-2.075 ; D9.1@96.039,-2.075 D9.1@96.05,-2.064
  L1 w1.524: Q4.S@92.996,-2.075 D9.1@96.039,-2.075
  L4 w0.762: v1(68.111,4.887) 68.111,1.575 ccw(c69.635,1.575) 68.557,0.498 70.676,-1.621 ccw(c71.753,-0.542) 71.753,-2.066 v3(75.299,-2.066)
  other v3: 74.101,-5.891 75.299,-5.891 76.499,-5.891 77.699,-5.891 78.901,-5.891 80.101,-5.891 81.291,-5.891 84.609,-5.891 85.807,-5.891 87.007,-5.891 88.207,-5.891 89.409,-5.891 90.609,-5.891 91.799,-5.891 74.099,-5.079 75.297,-5.079 76.497,-5.079 77.697,-5.079 78.899,-5.079 80.099,-5.079 81.289,-5.079 84.607,-5.079 85.805,-5.079 87.005,-5.079 88.205,-5.079 89.407,-5.079 90.607,-5.079 91.797,-5.079 74.101,-4.267 75.299,-4.267 76.499,-4.267 77.699,-4.267 78.901,-4.267 80.101,-4.267 81.291,-4.267 84.609,-4.267 85.807,-4.267 87.007,-4.267 88.207,-4.267 89.409,-4.267 90.609,-4.267 91.799,-4.267 75.301,-2.878 76.499,-2.878 77.699,-2.878 78.899,-2.878 80.101,-2.878 81.301,-2.878 82.491,-2.878 85.799,-2.878 86.997,-2.878 88.197,-2.878 89.397,-2.878 90.599,-2.878 91.799,-2.878 92.989,-2.878 76.497,-2.066 77.697,-2.066 78.897,-2.066 80.099,-2.066 81.299,-2.066 82.489,-2.066 85.797,-2.066 86.995,-2.066 88.195,-2.066 89.395,-2.066 90.597,-2.066 91.797,-2.066 75.301,-1.254 76.499,-1.254 77.699,-1.254 78.899,-1.254 80.101,-1.254 81.301,-1.254 82.491,-1.254 85.799,-1.254 86.997,-1.254 88.197,-1.254 89.397,-1.254 90.599,-1.254 91.799,-1.254 92.989,-1.254
NetC35_2: C35.2 R39.1 | length 3.4
  L1 w0.762: R39.1@69.377,1.298 70.288,1.298 70.735,1.744 C35.2@70.735,3.622
NetC36_2: C36.2 R36.1 R40.1 U2.10 | length 20
  L1 w0.2: U2.10@56.881,-10.185 56.881,-11.843 ccw(c57.281,-11.843) 56.998,-12.126 v2(57.89,-13.018) ; v2(68.424,-9.69) C36.2@69.196,-9.69 ; C36.2@69.206,-9.679 69.226,-9.699 70.302,-9.699 71.063,-8.937 71.224,-8.937 R40.1@71.383,-8.779
  L3 w0.2: v2(57.89,-13.018) 63.006,-7.901 cw(c63.288,-8.185) 63.288,-7.785 66.353,-7.785 cw(c66.353,-8.185) 66.635,-7.901 v2(68.424,-9.69)
NetC37_2: C37.2 R41.2 U2.11 | length 29.8
  L1 w0.152: v2(56.381,-11.637) U2.11@56.381,-10.185
  L1 w0.2: v2(65.786,10.334) R41.2@65.786,11.272 C37.2@66.94,11.272
  L4 w0.2: v2(56.381,-11.637) 56.381,-9.909 cw(c56.781,-9.909) 56.498,-9.627 56.592,-9.533 ccw(c56.309,-9.25) 56.709,-9.25 56.709,1.984 cw(c57.109,1.984) 56.826,2.266 59.301,4.742 cw(c59.583,4.458) 59.583,4.858 60.144,4.858 ccw(c60.144,5.258) 60.427,4.975 v2(65.786,10.334)
NetC38_2: C38.2 C39.2 Q8.D U5.5 U5.6 | length 10.5
  L1 w0.254: C39.2@59.506,14.676 60.89,14.676 ccw(c60.89,15.184) 61.248,14.824 Q8.D@61.754,15.33 61.754,11.806 ccw(c62.262,11.806) 61.901,11.448 62.732,10.618 ; U5.5@64.084,10.247 63.313,10.247 cw(c63.313,10.755) 62.955,10.395 62.732,10.618 ; U5.6@64.084,10.898 63.222,10.898 ccw(c63.222,10.39) 62.863,10.75 62.732,10.618